# EAGLE board WSN121B (EAGLE 5.10)
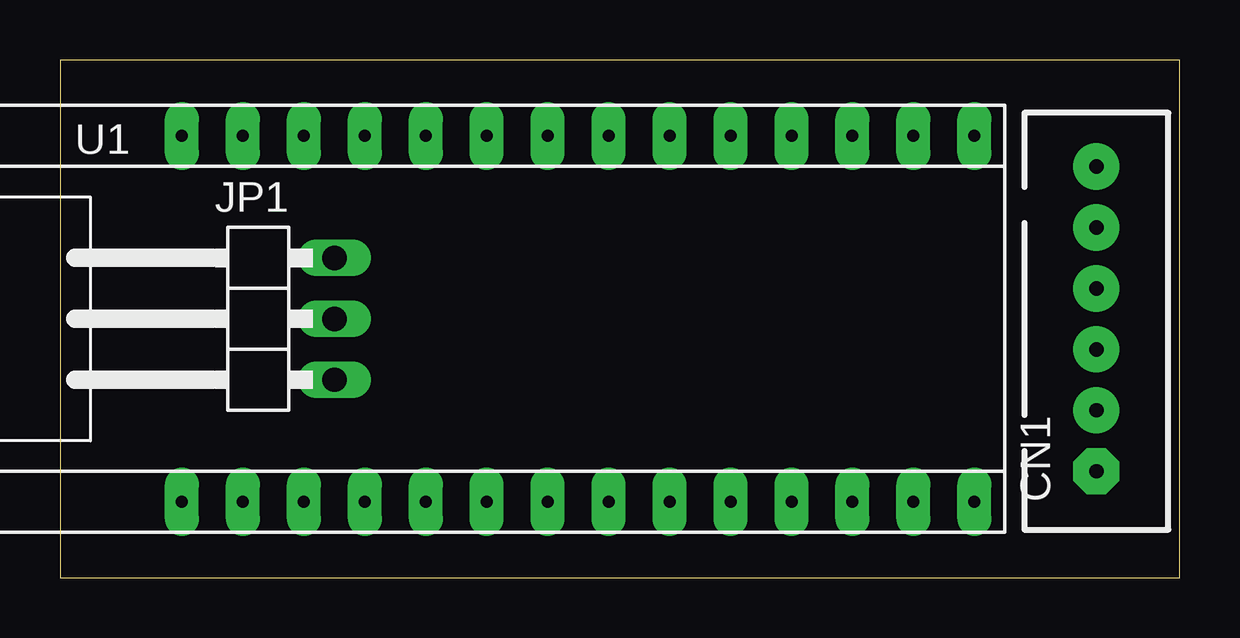
[diagram p0: board, top side]
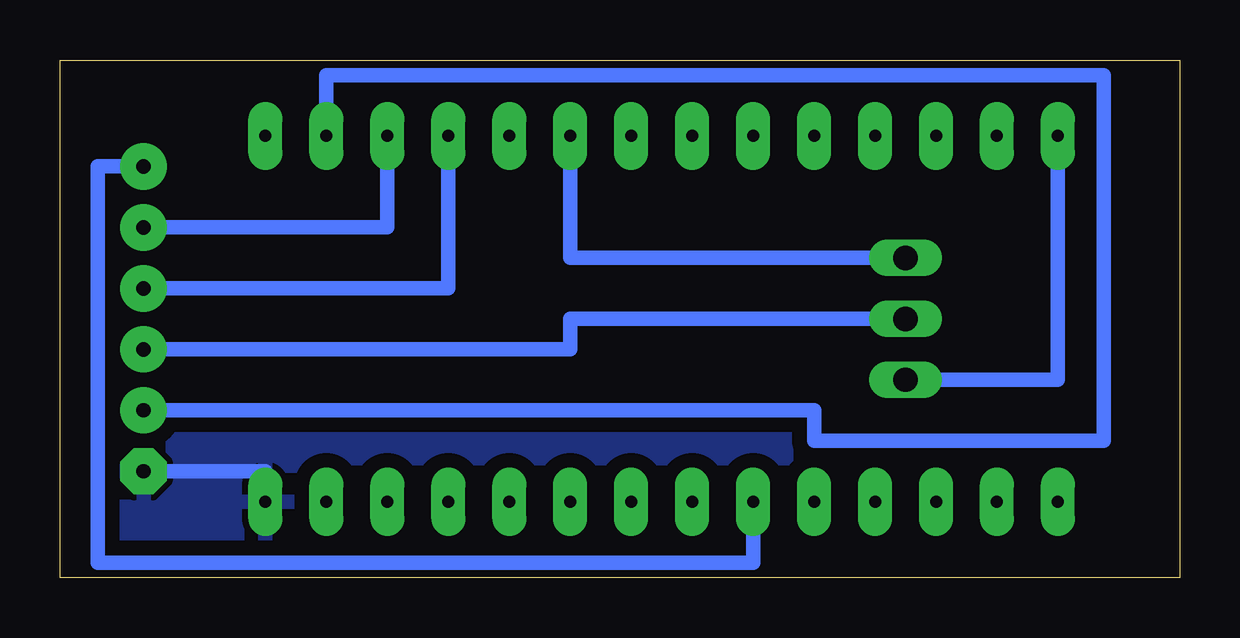
[diagram p1: board, bottom side, seen from below]

Size 46.66 x 21.58 mm. Coordinates in mm from the lower left corner, seen from the top.
Outline: 0,0 46.66,0 46.66,21.58 0,21.58 0,0
Copper layers (1*16): Top 0.035mm / dielectric 1.5mm / Bottom 0.035mm
Design rules "default": minimum track width 10mil, minimum drill 24mil, track to track 8mil, track to pad 8mil, pad to pad 8mil, via to via 8mil, smd to smd 8mil, copper to edge 40mil, drill to drill 8mil, minimum pad ring 10mil, minimum via ring 8mil, stop-mask expansion 4mil, vias tented up to drill 0mil, thermal gap 10mil

## Footprints (pad centres in the part's own frame; a part is rotated, then mirrored left to right if it is on the bottom)
CON_HRS_DIP_6 = drill 0.6 pad 1.93 octagon: 1 -6.35,0 | drill 0.6 pad 1.93 round: 2 -3.81,0; 3 -1.27,0; 4 1.27,0; 5 3.81,0; 6 6.35,0
1X03/90 = drill 1.016 long: 1 -2.54,-3.81; 2 0,-3.81; 3 2.54,-3.81
WSN121B = drill 0.5 pad 1.422 long: 1 -8.89,-6.35; 2 -6.35,-6.35; 3 -3.81,-6.35; 4 -1.27,-6.35; 5 1.27,-6.35; 6 3.81,-6.35; 7 6.35,-6.35; 8 8.89,-6.35; 9 11.43,-6.35; 10 13.97,-6.35; 11 16.51,-6.35; 12 19.05,-6.35; 13 21.59,-6.35; 14 24.13,-6.35; 15 24.13,8.89; 16 21.59,8.89; 17 19.05,8.89; 18 16.51,8.89; 19 13.97,8.89; 20 11.43,8.89; 21 8.89,8.89; 22 6.35,8.89; 23 3.81,8.89; 24 1.27,8.89; 25 -1.27,8.89; 26 -3.81,8.89; 27 -6.35,8.89; 28 -8.89,8.89

## Placement (x,y rotation side)
CN1  ARDUINO_TTL_6P  [CON_HRS_DIP_6]  43.18,10.79 90 top
JP1  [1X03/90]  7.62,10.79 90 top
U1  WSN121B  [WSN121B]  13.97,9.53 0 top

## Library data of the parts
CN1 = bant2
JP1 = pinheader
U1 = blank

## Nets
3V3: JP1.3 U1.20
5V#2: JP1.1 U1.28
GND: CN1.1 U1.14
GND#2: U1.24
N$1: CN1.6 U1.6
N$2: CN1.5 U1.17
N$3: CN1.4 U1.18
N$5: CN1.2 U1.16
VCC: CN1.3 JP1.2

## Tracks (layer width: path | path; a pad name or v marks a point on that pad's centre or on a via)
3V3
  Bottom 0.61: JP1.3 25.4,13.34 U1.20
5V#2
  Bottom 0.61: JP1.1 5.08,8.26 U1.28
GND
  Bottom 0.61: U1.14 38.1,4.45 CN1.1
  pour Bottom (isolate 0.61): 0,21.59 0,0 46.99,0 46.99,21.59
N$1
  Bottom 0.61: U1.6 17.78,0.64 45.09,0.64 45.09,17.14 CN1.6
N$2
  Bottom 0.61: CN1.5 33.02,14.61 U1.17
N$3
  Bottom 0.61: CN1.4 30.48,12.06 U1.18
N$5
  Bottom 0.61: U1.16 35.56,20.95 3.17,20.95 3.17,5.71 15.24,5.71 15.24,6.99 CN1.2
VCC
  Bottom 0.61: JP1.2 25.4,10.79 25.4,9.53 CN1.3